# EAGLE board MOL-v1-0 (EAGLE 8.2.2)
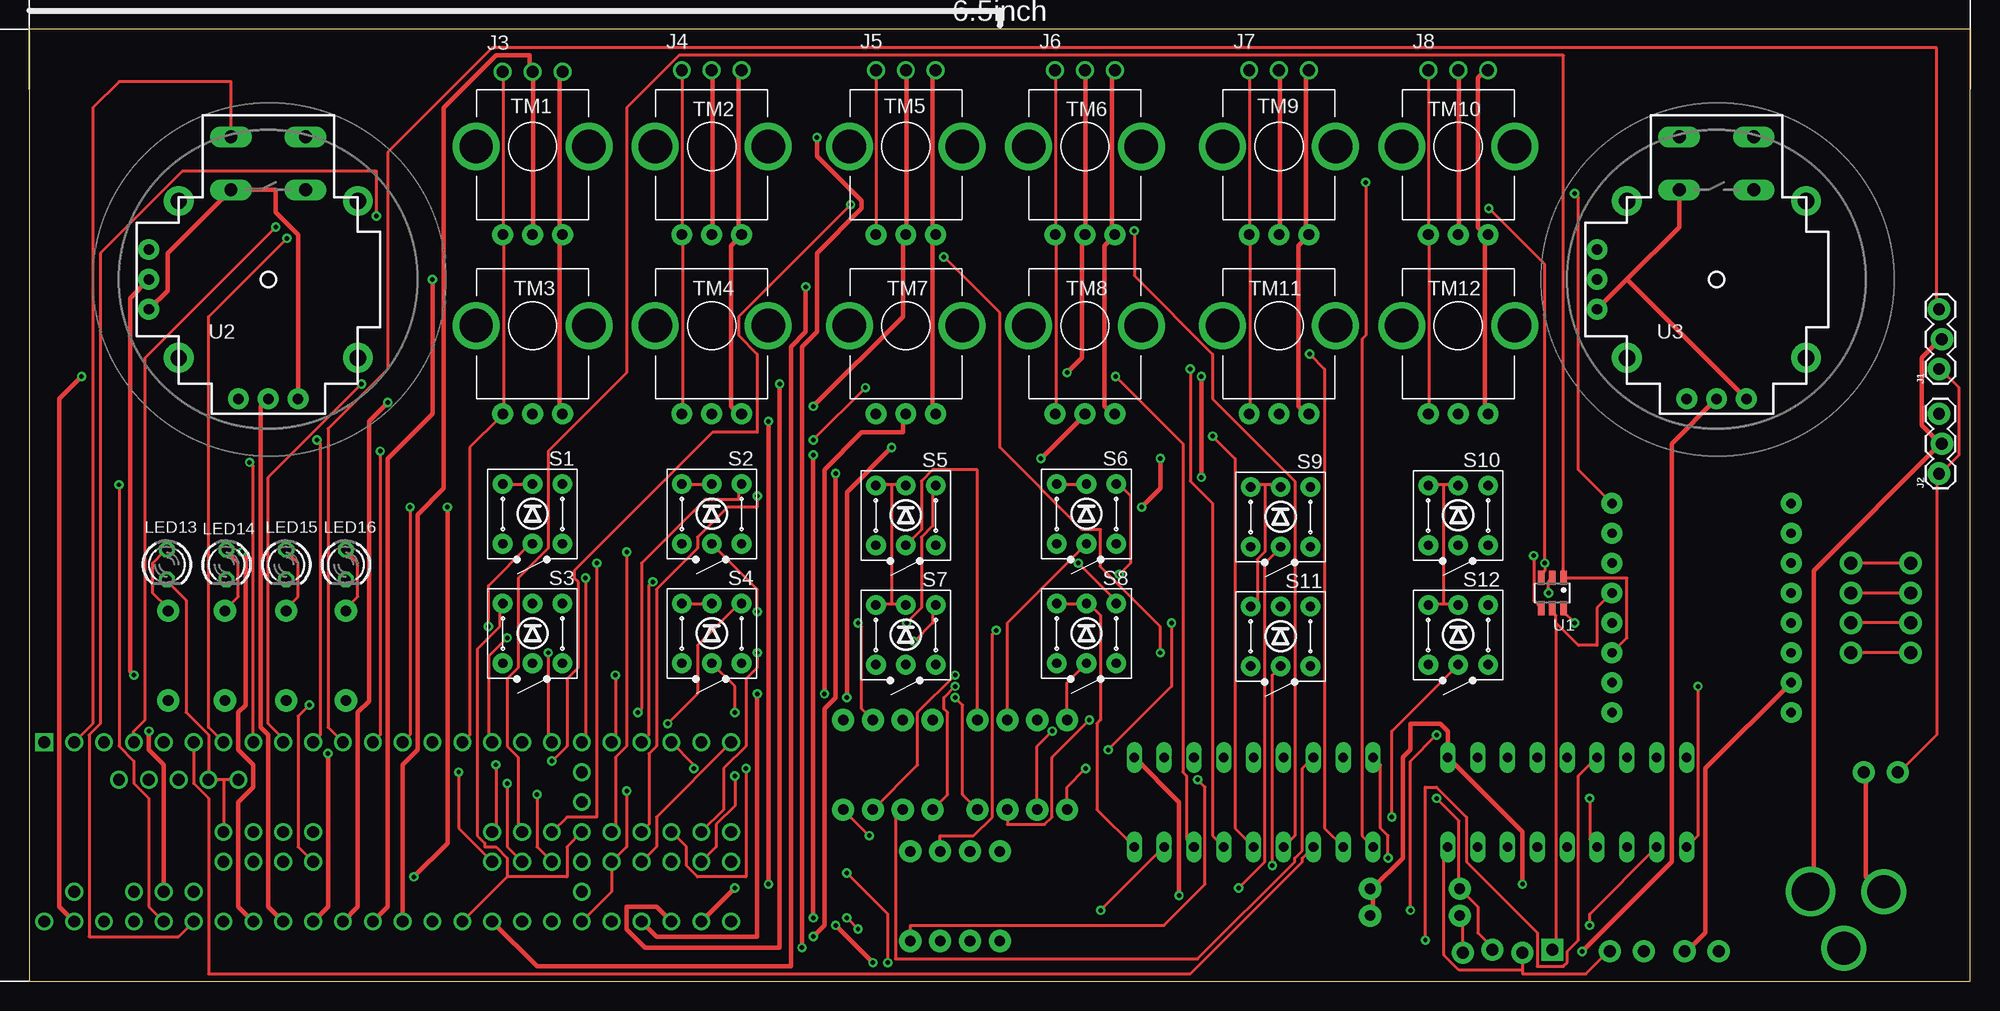
[diagram p0: board, top side]
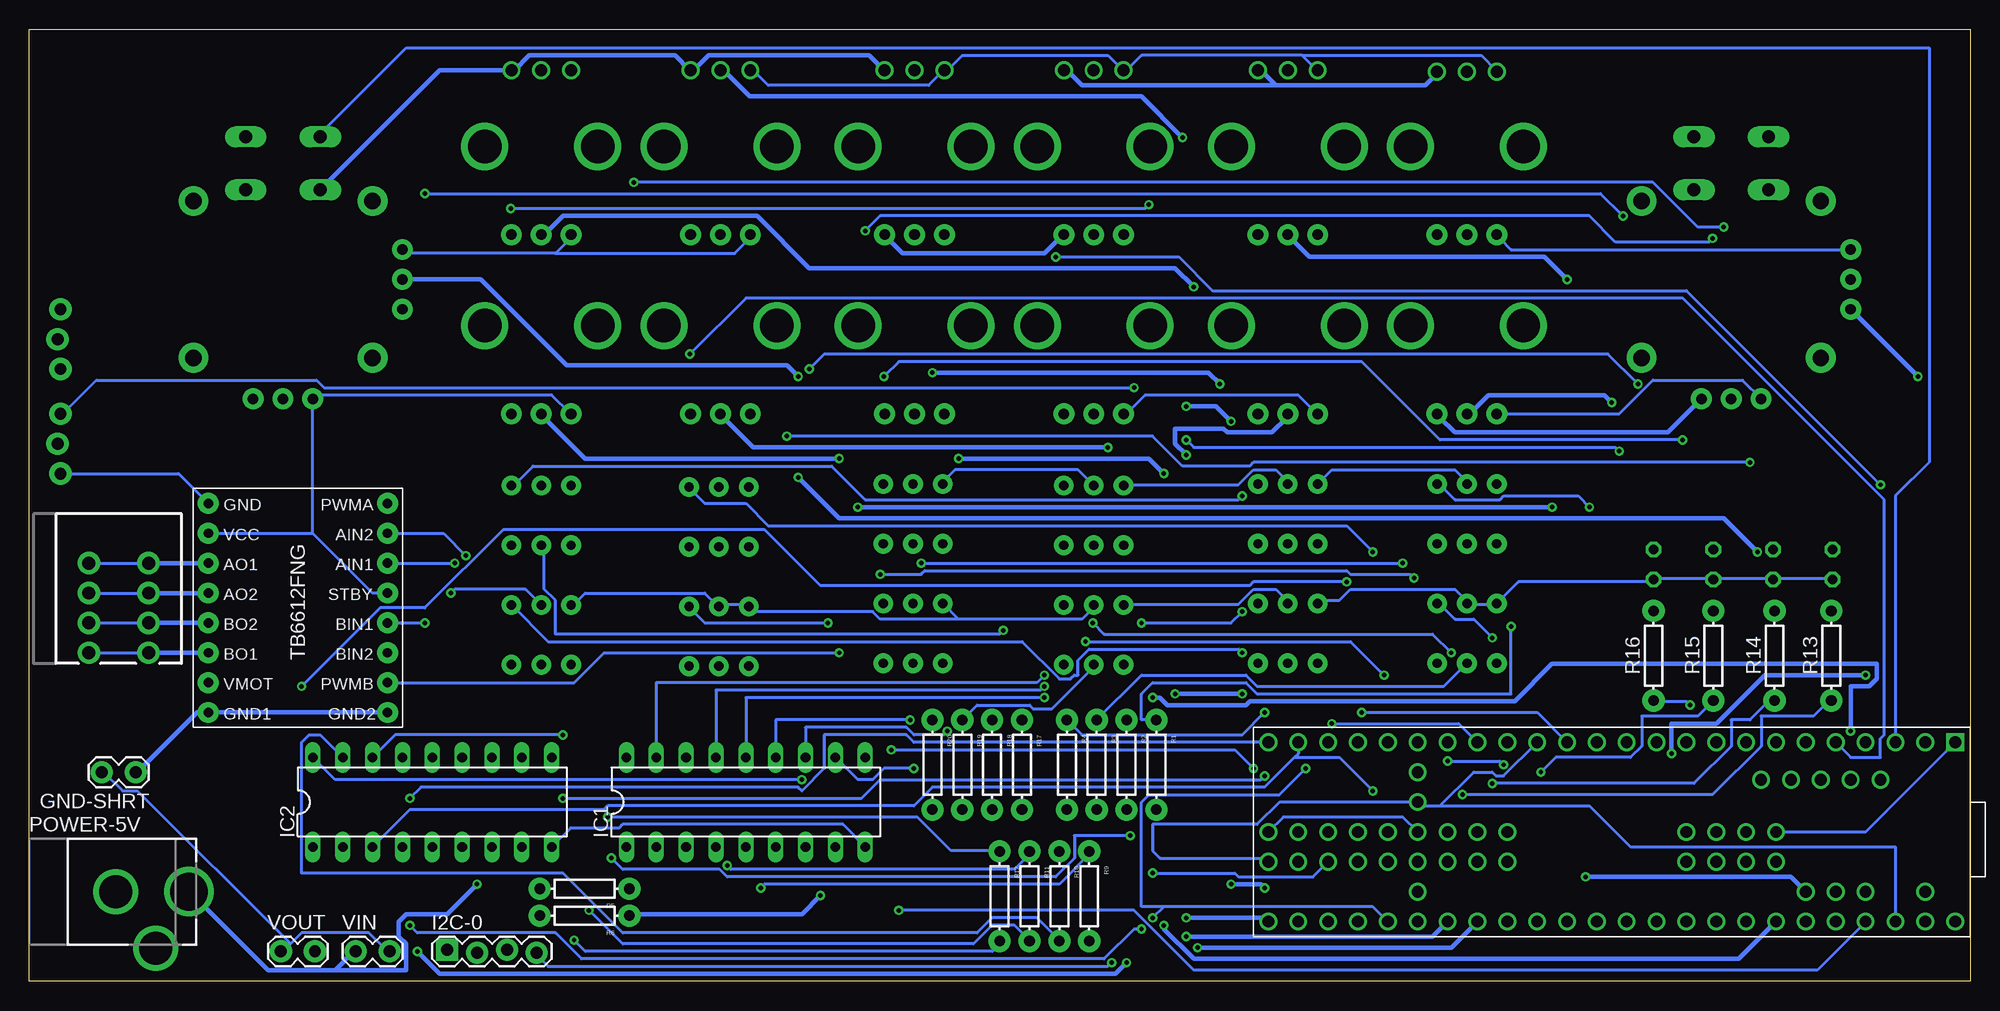
[diagram p1: board, bottom side, seen from below]

Size 165.08 x 80.95 mm. Coordinates in mm from the lower left corner, seen from the top.
Outline: 0,0 165.08,0 165.08,80.95 0,80.95 0,0
Copper layers (1*16): Top 0.035559375mm / dielectric 1.501140625mm / Bottom 0.035559375mm
Design rules "typical_4pcb": minimum track width 10mil, minimum drill 15mil, track to track 6mil, track to pad 6mil, pad to pad 6mil, via to via 6mil, smd to smd 6mil, copper to edge 15mil, drill to drill 8mil, minimum pad ring 10mil, minimum via ring 8mil, stop-mask expansion 4mil, vias tented up to drill 0mil, thermal gap 10mil
Net classes: 2 Power: width 0.381 mm, clearance 0.279 mm; 3 Analog Sig: width 0.381 mm, clearance 0.279 mm

## Footprints (pad centres in the part's own frame; a part is rotated, then mirrored left to right if it is on the bottom)
1X02_LOCK = drill 1.016 pad 1.88: 1 -0.178,0; 2 2.718,0
1X04_LOCK = drill 1.016 pad 1.88 square: 1 0,0.127 | drill 1.016 pad 1.88: 2 2.54,-0.127; 3 5.08,0.127; 4 7.62,-0.127
DIL18 = drill 0.813 long: 1 -10.16,-3.81; 2 -7.62,-3.81; 3 -5.08,-3.81; 4 -2.54,-3.81; 5 0,-3.81; 6 2.54,-3.81; 7 5.08,-3.81; 8 7.62,-3.81; 9 10.16,-3.81; 10 10.16,3.81; 11 7.62,3.81; 12 5.08,3.81; 13 2.54,3.81; 14 0,3.81; 15 -2.54,3.81; 16 -5.08,3.81; 17 -7.62,3.81; 18 -10.16,3.81
1X03_LOCK@1 = drill 1.016 pad 1.88: 1 0,0.127; 2 2.54,-0.127; 3 5.08,0.127
1X03_NO_SILK = drill 1.016 pad 1.524: 1 0,0; 2 2.54,0; 3 5.08,0
LED3MM = drill 0.813 octagon: A -1.27,0; K 1.27,0
SPRINGTERMINAL-2.54MM-4 = drill 1.1 pad 1.9: 1 7.62,-2.54; 2 5.08,-2.54; 3 2.54,-2.54; 4 0,-2.54; P$1 7.62,2.54; P$2 5.08,2.54; P$3 2.54,2.54; P$4 0,2.54
DCJACK_2MM_PTH = drill 2.8: GND 0,7.35; GNDBREAK 4.8,10.75 | drill 3.2: PWR 0,13.6
AXIAL-0.3EZ = drill 0.9 pad 1.88: P$1 -3.81,0; P$2 3.81,0
TR2-SWITCH-MOMENTARY-LED = drill 0.8 pad 1.676: 1 2.54,-2.54; 2 2.54,2.54; 3 -2.54,-2.54; 4 -2.54,2.54; A 0,2.54; C 0,-2.54
TRIM-PCB-9MM = drill 0.9 pad 1.778: 1 -2.54,-7.5; 2 0,-7.5; 3 2.54,-7.5 | drill 2.845 pad 4: 5 -4.8,0; M2 4.8,0
SOT23-6 = smd 0.55 x 1.2: 1 -0.95,-1.3; 2 0,-1.3; 3 0.95,-1.3; 4 0.95,1.3; 5 0,1.3; 6 -0.95,1.3
JOYSTICK = drill 1.1 pad 1.778 long: B1A -3.175,12.12; B1B 3.175,12.12; B2A -3.175,7.62; B2B 3.175,7.62 | drill 0.889 pad 1.778: H1 -2.54,-10.16; H2 0,-10.16; H3 2.54,-10.16; V1 -10.16,2.54; V2 -10.16,0; V3 -10.16,-2.54 | drill 1.397 pad 2.54: MOUNT1 -7.62,6.668; MOUNT2 -7.62,-6.668; MOUNT3 7.62,-6.668; MOUNT4 7.62,6.668
T36 = drill 1: 0 -15.24,-5.08; 1 -12.7,-5.08; 2 -10.16,-5.08; 3 -7.62,-5.08; 3V3(1) 17.78,-5.08; 3V3(2) 27.94,0; 3V3(3) -12.7,10.16; 3V3(4) 40.64,5.08; 4 -5.08,-5.08; 5 -2.54,-5.08; 5V -11.43,-1.905; 6 0,-5.08; 7 2.54,-5.08; 8 5.08,-5.08; 9 7.62,-5.08; 10 10.16,-5.08; 11 12.7,-5.08; 12 15.24,-5.08; 13 15.24,10.16; 14 12.7,10.16; 15 10.16,10.16; 16 7.62,10.16; 17 5.08,10.16; 18 2.54,10.16; 19 0,10.16; 20 -2.54,10.16; 21 -5.08,10.16; 22 -7.62,10.16; 23 -10.16,10.16; 24 20.32,-5.08; 25 22.86,-5.08; 26 25.4,-5.08; 27 27.94,-5.08; 28 30.48,-5.08; 29 33.02,-5.08; 30 35.56,-5.08; 31 38.1,-5.08; 32 40.64,-5.08; 33 40.64,10.16; 34 38.1,10.16; 35 35.56,10.16; 36 33.02,10.16; 37 30.48,10.16; 38 27.94,10.16; 39 25.4,10.16; 40 20.32,2.54; 41 22.86,2.54; 42 25.4,2.54; 43 30.48,2.54; 44 33.02,2.54; 45 35.56,2.54; 46 38.1,2.54; 47 38.1,5.08; 48 35.56,5.08; 49 33.02,5.08; 50 30.48,5.08; 51 25.4,5.08; 52 22.86,5.08; 53 20.32,5.08; 54 5.08,5.08; 55 2.54,5.08; 56 0,5.08; 57 -2.54,5.08; A10 -7.62,7.62; A11 -5.08,7.62; AGND -15.24,10.16; AREF -10.16,7.62; D+ -6.35,-1.905; D- -8.89,-1.905; DAC0 22.86,10.16; DAC1 20.32,10.16; DC 2.54,2.54; DD 5.08,2.54; DE 0,2.54; G1 27.94,2.54; G2 17.78,10.16; G3 40.64,2.54; G4 -3.81,-1.905; G5 -1.27,-1.905; G6 -2.54,2.54; P 27.94,5.08; R 27.94,7.62; VBAT 27.94,-2.54; VIN -17.78,10.16; VUSB -15.24,7.62 | drill 1 square: G0 -17.78,-5.08
POLOLU_TB6612FNG = drill 0.8 pad 1.778: AIN1 7.62,3.81; AIN2 7.62,6.35; AO1 -7.62,3.81; AO2 -7.62,1.27; BIN1 7.62,-1.27; BIN2 7.62,-3.81; BO1 -7.62,-3.81; BO2 -7.62,-1.27; GND -7.62,8.89; GND1 -7.62,-8.89; GND2 7.62,-8.89; PWMA 7.62,8.89; PWMB 7.62,-6.35; STBY 7.62,1.27; VCC -7.62,6.35; VMOT -7.62,-6.35

## Placement (x,y rotation side)
GND-SHRT  [1X02_LOCK]  156.21,17.78 180 bottom
I2C-0  [1X04_LOCK]  129.54,2.54 0 bottom
IC1  ULN2803  [DIL18]  104.14,15.24 0 bottom
IC2  ULN2803  [DIL18]  130.81,15.24 0 bottom
J1  SERVO 1  [1X03_LOCK@1]  162.56,52.07 90 top
J2  SERVO 2  [1X03_LOCK@1]  162.56,43.18 90 top
J3  [1X03_NO_SILK]  40.26,77.34 0 top
J4  [1X03_NO_SILK]  55.5,77.47 0 top
J5  [1X03_NO_SILK]  72.01,77.47 0 top
J6  [1X03_NO_SILK]  87.25,77.47 0 top
J7  [1X03_NO_SILK]  103.76,77.47 0 top
J8  [1X03_NO_SILK]  119,77.47 0 top
LED13  [LED3MM]  11.68,35.43 270 top
LED14  [LED3MM]  16.76,35.43 270 top
LED15  [LED3MM]  21.84,35.43 270 top
LED16  [LED3MM]  26.92,35.43 270 top
MOTORS1  [SPRINGTERMINAL-2.54MM-4]  157.48,35.56 270 bottom
POWER-5V  [DCJACK_2MM_PTH]  165.1,7.62 270 bottom
R1  [AXIAL-0.3EZ]  69.22,18.41 270 bottom
R2  [AXIAL-0.3EZ]  71.75,18.41 270 bottom
R3  [AXIAL-0.3EZ]  74.3,18.41 270 bottom
R4  [AXIAL-0.3EZ]  76.83,18.41 270 bottom
R5  [AXIAL-0.3EZ]  117.86,7.87 180 bottom
R6  [AXIAL-0.3EZ]  117.86,5.59 180 bottom
R9  [AXIAL-0.3EZ]  74.93,7.24 270 bottom
R10  [AXIAL-0.3EZ]  77.47,7.24 270 bottom
R11  [AXIAL-0.3EZ]  80.01,7.24 270 bottom
R12  [AXIAL-0.3EZ]  82.55,7.24 270 bottom
R13  [AXIAL-0.3EZ]  11.81,27.69 270 bottom
R14  [AXIAL-0.3EZ]  16.64,27.69 270 bottom
R15  [AXIAL-0.3EZ]  21.84,27.69 270 bottom
R16  [AXIAL-0.3EZ]  26.92,27.69 270 bottom
R17  [AXIAL-0.3EZ]  80.64,18.41 270 bottom
R18  [AXIAL-0.3EZ]  83.19,18.41 270 bottom
R19  [AXIAL-0.3EZ]  85.72,18.41 270 bottom
R20  [AXIAL-0.3EZ]  88.27,18.41 270 bottom
S1  SW-LEDPTH  [TR2-SWITCH-MOMENTARY-LED]  42.8,39.75 180 top
S2  SW-LEDPTH  [TR2-SWITCH-MOMENTARY-LED]  58.04,39.75 180 top
S3  SW-LEDPTH  [TR2-SWITCH-MOMENTARY-LED]  42.8,29.59 180 top
S4  SW-LEDPTH  [TR2-SWITCH-MOMENTARY-LED]  58.04,29.59 180 top
S5  SW-LEDPTH  [TR2-SWITCH-MOMENTARY-LED]  74.55,39.62 180 top
S6  SW-LEDPTH  [TR2-SWITCH-MOMENTARY-LED]  89.92,39.75 180 top
S7  SW-LEDPTH  [TR2-SWITCH-MOMENTARY-LED]  74.55,29.46 180 top
S8  SW-LEDPTH  [TR2-SWITCH-MOMENTARY-LED]  89.92,29.59 180 top
S9  SW-LEDPTH  [TR2-SWITCH-MOMENTARY-LED]  106.43,39.5 180 top
S10  SW-LEDPTH  [TR2-SWITCH-MOMENTARY-LED]  121.54,39.62 180 top
S11  SW-LEDPTH  [TR2-SWITCH-MOMENTARY-LED]  106.43,29.34 180 top
S12  SW-LEDPTH  [TR2-SWITCH-MOMENTARY-LED]  121.54,29.46 180 top
TM1  [TRIM-PCB-9MM]  42.8,70.99 0 top
TM2  [TRIM-PCB-9MM]  58.04,70.99 0 top
TM3  [TRIM-PCB-9MM]  42.8,55.75 0 top
TM4  [TRIM-PCB-9MM]  58.04,55.75 0 top
TM5  [TRIM-PCB-9MM]  74.55,70.99 0 top
TM6  [TRIM-PCB-9MM]  89.79,70.99 0 top
TM7  [TRIM-PCB-9MM]  74.55,55.75 0 top
TM8  [TRIM-PCB-9MM]  89.79,55.75 0 top
TM9  [TRIM-PCB-9MM]  106.3,70.99 0 top
TM10  [TRIM-PCB-9MM]  121.54,70.99 0 top
TM11  [TRIM-PCB-9MM]  106.3,55.75 0 top
TM12  [TRIM-PCB-9MM]  121.54,55.75 0 top
U1  SN74LVC2G04DBV  [SOT23-6]  129.54,33.02 180 top
U2  JOYSTICKPTH  [JOYSTICK]  20.32,59.69 0 top
U3  JOYSTICKPTH  [JOYSTICK]  143.51,59.69 0 top
U$1  TEENSY3_6--ALLPINS  [T36]  19.05,15.24 180 bottom
U$7  POLOLU_TB6612FNG  [POLOLU_TB6612FNG]  142.24,31.75 0 bottom
VIN  [1X02_LOCK]  137.16,2.54 0 bottom
VOUT  [1X02_LOCK]  143.51,2.54 0 bottom

## Library data of the parts
GND-SHRT I2C-0 MOTORS1 U$7 VIN VOUT = CMU-ArtFab
IC1 IC2 = uln-udn
J1-J8 = SparkFun-Connectors
LED13-LED16 = led
POWER-5V U2 U3 = adafruit
R1-R6 R9-R20 = SparkFun-Resistors
S1-S12 TM1-TM12 = Daniel
U1 = 74LV
U$1 = Teensy_3_6

## Nets
+3V3: I2C-0.1 J3.1 J4.1 J5.1 J6.1 J7.1 J8.1 TM1.1 TM2.1 TM3.1 TM4.1 TM5.1 TM6.1 TM7.1 TM8.1 TM9.1 TM10.1 TM11.1 TM12.1 U1.5 U2.H1 U2.V1 U3.H1 U3.V1 U$1.3V3(1) U$1.3V3(2) U$1.3V3(3) U$1.3V3(4) U$7.STBY U$7.VCC
+5V [Power]: IC1.10 IC2.10 J1.2 J2.2 POWER-5V.PWR R5.P$1 R6.P$1 VIN.1
A1 [Analog Sig]: J3.2 TM1.2 U$1.14
A2 [Analog Sig]: J4.2 TM2.2 U$1.15
A3 [Analog Sig]: TM3.2 U$1.16
A4 [Analog Sig]: TM4.2 U$1.33
A5 [Analog Sig]: J5.2 TM5.2 U$1.34
A6 [Analog Sig]: J6.2 TM6.2 U$1.35
A7 [Analog Sig]: TM7.2 U$1.36
A8 [Analog Sig]: TM8.2 U$1.39
A9 [Analog Sig]: J7.2 TM9.2 U$1.DAC0
A10 [Analog Sig]: J8.2 TM10.2 U$1.DAC1
A11 [Analog Sig]: TM11.2 U$1.A10
A12 [Analog Sig]: TM12.2 U$1.A11
AGND [Analog Sig]: J3.3 J4.3 J5.3 J6.3 J7.3 J8.3 TM1.3 TM2.3 TM3.3 TM4.3 TM5.3 TM6.3 TM7.3 TM8.3 TM9.3 TM10.3 TM11.3 TM12.3 U2.B2A U2.H3 U2.V3 U3.B2A U3.H3 U3.V3 U$1.AGND
B1: S1.3 U$1.11
B2: S2.3 U$1.12
B3: S3.3 U$1.24
B4: S4.3 U$1.25
B5: S5.3 U$1.26
B6: S6.3 U$1.27
B7: S7.3 U$1.28
B8: S8.3 U$1.42
B9: S9.3 U$1.43
B10: S10.3 U$1.44
B11: S11.3 U$1.45
B12: S12.3 U$1.46
GND: GND-SHRT.2 I2C-0.2 IC1.9 IC2.9 J1.1 J2.1 LED13.K LED14.K LED15.K LED16.K S1.1 S1.C S2.1 S2.C S3.1 S3.C S4.1 S4.C S5.1 S5.C S6.1 S6.C S7.1 S7.C S8.1 S8.C S9.1 S9.C S10.1 S10.C S11.1 S11.C S12.1 S12.C U1.2 U$1.G0 U$1.G1 U$1.G2 U$1.G3 U$1.G4 U$1.G5 U$1.G6 U$7.GND VIN.2 VOUT.1
GND_MOT [Power]: GND-SHRT.1 POWER-5V.GND U$7.GND1 U$7.GND2
GNDBREAK: POWER-5V.GNDBREAK
I2C_SCL: I2C-0.3 R5.P$2 U$1.47
I2C_SDA: I2C-0.4 R6.P$2 U$1.48
L1: IC1.1 U$1.2
L2: IC1.2 U$1.3
L3: IC1.3 U$1.4
L4: IC1.4 U$1.5
L5: IC1.5 U$1.6
L6: IC1.6 U$1.7
L7: IC1.7 U$1.8
L8: IC1.8 U$1.23
L9: IC2.1 U$1.29
L10: IC2.2 U$1.30 U$1.37
L11: IC2.3 U$1.31 U$1.38 U$1.50
L12: IC2.4 U$1.32 U$1.49
L13: IC2.5
L14: IC2.6
L15: IC2.7
L16: IC2.8
LED1: IC1.18 R1.P$2
LED2: IC1.17 R2.P$2
LED3: IC1.16 R3.P$2
LED4: IC1.15 R4.P$2
LED5: IC1.14 R17.P$2
LED6: IC1.13 R18.P$2
LED7: IC1.12 R19.P$2
LED8: IC1.11 R20.P$2
LED9: IC2.18 R9.P$2
LED10: IC2.17 R10.P$2
LED11: IC2.16 R11.P$2
LED12: IC2.15 R12.P$2
LED13: IC2.14
LED14: IC2.13
LED15: IC2.12
LED16: IC2.11
M_AIN: U1.3 U$1.40 U$7.AIN1
M_BIN: U1.1 U$1.41 U$7.BIN2
M_JOYB: U2.B1A U$1.0
M_JOYH [Analog Sig]: U2.H2 U$1.18
M_JOYV [Analog Sig]: U2.V2 U$1.17
M_PWMA: U$1.21 U$7.PWMA
M_PWMB: U$1.22 U$7.PWMB
N$1: R1.P$1 S1.A
N$2: LED13.A R13.P$1
N$3: LED14.A R14.P$1
N$4: LED15.A R15.P$1
N$5: U1.6 U$7.BIN1
N$6: U1.4 U$7.AIN2
N$7: LED16.A R16.P$1
N$8: R2.P$1 S2.A
N$9: R3.P$1 S3.A
N$10: R4.P$1 S4.A
N$15: R9.P$1 S9.A
N$16: R10.P$1 S10.A
N$17: R11.P$1 S11.A
N$18: R12.P$1 S12.A
N$19: R17.P$1 S5.A
N$20: R18.P$1 S6.A
N$21: R19.P$1 S7.A
N$22: R20.P$1 S8.A
N$45 [Power]: MOTORS1.P$1 U$7.BO1
N$46 [Power]: MOTORS1.P$2 U$7.BO2
N$52 [Power]: MOTORS1.P$3 U$7.AO2
N$54 [Power]: MOTORS1.P$4 U$7.AO1
S1: J1.3 U$1.9
S2: J2.3 U$1.10
S_JOYB: U3.B1A U$1.1
S_JOYH [Analog Sig]: U3.H2 U$1.20
S_JOYV [Analog Sig]: U3.V2 U$1.19
U1: R13.P$2 U$1.51
U2: R14.P$2 U$1.52
U3: R15.P$2 U$1.53
U4: R16.P$2 U$1.54
VMOT [Power]: U$7.VMOT VOUT.2

## Tracks (layer width: path | path; a pad name or v marks a point on that pad's centre or on a via)
+3V3
  Top 0.254: 129.86,30.48 129.86,31.11 129.54,31.43 U1.5 | 129.86,30.48 131.76,28.57 133.35,28.57 133.35,31.75 U$7.STBY | 129.86,30.48 129.86,3.17 129.54,2.86 I2C-0.1 | J3.1 40.32,77.15 40.32,63.5 TM1.1 40.32,63.18 40.32,48.26 TM3.1 40.01,47.94 37.47,45.4 37.47,20.95 U$1.3V3(1) | J7.1 103.82,77.47 103.82,63.5 TM9.1 103.82,63.18 103.82,48.26 TM11.1 | J8.1 119.06,77.47 119.06,63.5 TM10.1 119.06,63.18 119.06,48.26 TM12.1 | J5.1 72.07,77.47 72.07,63.5 TM5.1 | J6.1 87.31,77.47 87.31,63.5 TM6.1 87.31,63.18 87.31,48.26 TM8.1 | J4.1 55.56,77.47 55.56,63.5 TM2.1 55.56,63.18 55.56,48.26 TM4.1
  Bottom 0.254: U$1.3V3(3) 6.35,11.43 28.89,11.43 32.38,14.92 45.09,14.92 | 45.09,14.92 46.67,14.92 U$1.3V3(2) 58.74,15.24 60.64,13.34 69.53,13.34 69.53,11.11 68.9,10.48 60.01,10.48 U$1.3V3(4) | U$1.3V3(1) 39.69,17.46 40.32,17.46 40.64,17.78 42.23,17.78 45.09,14.92 | 140.97,38.1 U3.H1 140.65,49.85 120.65,49.85 119.06,48.26 TM12.1 | U$7.VCC 140.97,38.1 | 140.97,38.1 135.89,33.02 U$7.STBY | U2.H1 19.37,51.12 26.99,51.12 29.84,48.26 40.01,48.26 TM3.1 | U2.V1 39.05,62.23 40.01,63.18 TM1.1 | U3.V1 133.03,61.91 120.33,61.91 | 120.33,61.91 119.06,63.18 TM10.1 | 120.33,61.91 105.09,61.91 103.82,63.18 TM9.1 | TM7.1 71.75,48.26 70.17,49.85 57.15,49.85 55.56,48.26 TM4.1 | 56.83,78.74 70.48,78.74 71.75,77.47 J5.1 72.07,77.47 73.34,78.74 85.72,78.74 87,77.47 J6.1 87.31,77.47 88.58,76.2 102.23,76.2 103.5,77.47 J7.1 | 56.83,78.74 55.56,77.47 J4.1 | 56.83,78.74 41.59,78.74 40.32,77.47 J3.1
+5V  (via drill 0.38)
  Top 0.381: IC1.10 97.79,15.24 v97.79,7.3 | R6.P$1 114.3,5.71 114.3,7.62 R5.P$1 114.3,7.94 116.84,10.48 116.84,19.05 117.47,19.68 117.47,21.91 120.02,21.91 120.65,21.27 IC2.10 127,12.7 v127,8.26 | 162.56,45.72 160.97,47.31 160.97,53.02 162.56,54.61 J1.2 | 162.56,45.72 151.76,34.92 151.76,7.62 POWER-5V.PWR | 162.56,45.72 J2.2
  Bottom 0.381: v97.79,7.3 99.38,5.71 113.98,5.71 R6.P$1 | 139.06,0.95 137.48,2.54 VIN.1 | 139.06,0.95 144.78,0.95 151.45,7.62 POWER-5V.PWR | v127,8.26 129.54,5.71 133.03,5.71 133.67,5.08 133.67,3.81 133.03,3.17 133.03,0.95 139.06,0.95
A1
  Top 0.381: U$1.14 31.75,18.41 33.02,19.68 33.02,39.69 35.24,41.91 35.24,74.3 39.69,78.74 42.55,78.74 42.55,77.47 J3.2 42.86,77.15 42.86,63.5 TM1.2
A2  (via drill 0.38)
  Top 0.381: U$1.15 30.48,6.35 30.48,44.45 34.29,48.26 v34.29,59.69 | J4.2 58.1,77.47 58.1,63.5 TM2.2
  Bottom 0.381: v34.29,59.69 36.2,61.59 56.2,61.59 57.78,63.18 TM2.2
A3  (via drill 0.38)
  Top 0.381: U$1.16 27.94,6.35 27.94,22.86 28.89,23.81 28.89,47.62 v30.48,49.21
  Bottom 0.381: v30.48,49.21 31.11,49.85 40.96,49.85 42.55,48.26 TM3.2
A4  (via drill 0.38)
  Top 0.381: v66.67,44.77 v66.67,5.4
  Bottom 0.381: U$1.33 60.01,5.4 v66.67,5.4 | v66.67,44.77 67.63,45.72 67.63,46.99 63.5,46.99 63.18,46.67 59.37,46.67 58.1,47.94 TM4.2
A5  (via drill 0.38)
  Top 0.381: v60.01,7.94 U$1.34 | v62.87,47.62 v62.87,8.26 | v66.67,48.9 74.3,56.52 74.3,63.18 TM5.2 74.61,63.5 74.61,77.47 J5.2
  Bottom 0.381: v60.01,7.94 60.33,8.26 v62.87,8.26 | v62.87,47.62 64.14,48.9 v66.67,48.9
A6  (via drill 0.38)
  Top 0.381: U$1.35 53.34,6.35 50.8,6.35 50.8,4.45 52.39,2.86 63.82,2.86 v63.82,50.8 | v88.27,51.75 89.53,53.02 89.53,63.18 TM6.2 89.85,63.5 89.85,77.47 J6.2
  Bottom 0.381: v63.82,50.8 64.77,51.75 v88.27,51.75
A7  (via drill 0.38)
  Top 0.381: U$1.36 53.34,3.81 61.91,3.81 v61.91,24.45 | v67.63,24.45 67.63,43.5 70.8,46.67 74.3,46.67 74.3,47.94 TM7.2
  Bottom 0.381: v67.63,24.45 v61.91,24.45
A8  (via drill 0.38)
  Top 0.381: v66.67,3.81 67.63,4.76 67.63,23.18 68.58,24.13 v68.58,43.18 | v86.04,44.45 89.53,47.94 TM8.2
  Bottom 0.381: U$1.39 45.72,3.81 v66.67,3.81 | v68.58,43.18 69.85,44.45 v86.04,44.45
A9  (via drill 0.38)
  Top 0.381: v65.72,2.86 65.72,53.98 66.99,55.24 66.99,61.91 70.8,65.72 70.8,66.36 66.99,70.17 v66.99,71.75 | TM9.2 106.36,63.5 106.36,77.47 J7.2
  Bottom 0.381: U$1.DAC0 44.13,2.86 v65.72,2.86 | v66.99,71.75 70.48,75.25 103.82,75.25 106.05,77.47 J7.2
A10  (via drill 0.38)
  Top 0.381: U$1.DAC1 43.18,1.27 64.77,1.27 64.77,53.98 66.04,55.24 v66.04,59.05 | J8.2 121.6,77.47 121.6,63.5 TM10.2
  Bottom 0.381: v66.04,59.05 67.63,60.64 98.74,60.64 103.19,65.09 119.7,65.09 121.28,63.5 TM10.2
A11  (via drill 0.38)
  Top 0.381: U$1.A10 11.43,18.41 10.16,19.68 v10.16,21.27 | v69.53,24.13 69.53,41.59 v73.34,45.4
  Bottom 0.381: v10.16,21.27 10.16,25.08 8.57,25.08 7.94,25.72 7.94,26.99 35.56,26.99 38.73,23.81 61.28,23.81 61.59,23.5 68.26,23.5 68.9,24.13 v69.53,24.13 | v73.34,45.4 103.5,45.4 106.05,47.94 TM11.2
A12  (via drill 0.38)
  Top 0.381: v32.7,8.89 35.56,11.75 v35.56,40.32 | v94.61,40.32 96.2,41.91 v96.2,44.45
  Bottom 0.381: U$1.A11 15.24,8.89 v32.7,8.89 | v94.61,40.32 v35.56,40.32 | v96.2,44.45 117.79,44.45 121.28,47.94 TM12.2
AGND  (via drill 0.38)
  Top 0.381: U$1.AGND 2.54,6.35 2.54,49.53 v4.45,51.44 | U2.V3 11.75,58.74 11.75,61.91 U2.B2A 20.95,67.31 20.95,65.41 22.86,63.5 U2.H3 | 135.89,59.69 140.34,64.14 U3.B2A | 135.89,59.69 U3.V3 | 135.89,59.69 U3.H3 | J7.3 108.58,77.47 108.58,63.5 TM9.3 108.58,63.18 107.95,62.55 107.95,48.9 108.58,48.26 TM11.3 | J8.3 123.83,77.47 123.19,76.83 123.19,64.14 123.83,63.5 TM10.3 123.83,63.18 123.83,48.26 TM12.3 | J6.3 92.08,77.47 92.08,63.5 TM6.3 92.08,63.18 91.44,62.55 91.44,48.9 92.08,48.26 TM8.3 | J5.3 76.83,77.47 76.83,63.5 TM5.3 76.83,63.18 76.83,48.26 TM7.3 | J4.3 60.33,77.47 60.33,63.5 TM2.3 60.33,63.18 59.69,62.55 59.69,48.9 60.33,48.26 TM4.3 | J3.3 45.09,77.15 45.09,63.5 TM1.3 45.09,63.18 45.09,48.26 TM3.3
  Bottom 0.381: U2.V3 v4.45,51.44 | U3.B2A 130.18,77.47 J8.3 123.83,77.47 122.56,78.74 110.17,78.74 108.9,77.47 J7.3 108.58,77.47 107.31,78.74 93.66,78.74 92.39,77.47 J6.3 | U2.H3 25.72,46.67 43.81,46.67 45.09,47.94 TM3.3 | 59.05,76.2 60.33,77.47 J4.3 | 59.05,76.2 46.35,76.2 45.4,77.15 J3.3 | 59.05,76.2 75.56,76.2 76.83,77.47 J5.3 | TM6.3 92.08,63.18 90.81,61.91 78.74,61.91 77.47,63.18 77.15,63.18 TM5.3
B1  (via drill 0.38)
  Top 0.254: U$1.11 32.38,20.95 v32.38,40.32
  Bottom 0.254: v32.38,40.32 33.34,41.27 39.69,41.27 40.01,40.96 43.81,40.96 45.09,42.23 S1.3
B2  (via drill 0.38)
  Top 0.254: v51.75,22.86 52.07,23.18 52.07,35.56 57.47,40.96 60.33,40.96 60.33,42.23 S2.3
  Bottom 0.254: U$1.12 36.83,22.86 v51.75,22.86
B3  (via drill 0.38)
  Top 0.254: U$1.24 39.05,20.64 39.05,27.62 v40.64,29.21
  Bottom 0.254: v40.64,29.21 42.23,30.8 43.81,30.8 45.09,32.07 S3.3
B4  (via drill 0.38)
  Top 0.254: v54.29,21.91 56.83,24.45 56.83,28.57 60.33,32.07 S4.3
  Bottom 0.254: U$1.25 43.5,21.91 v54.29,21.91
B5  (via drill 0.38)
  Top 0.254: U$1.26 44.13,20.64 v44.13,27.94 | v74.61,30.48 75.88,31.75 75.88,37.78 76.83,38.73 76.83,41.91 S5.3
  Bottom 0.254: v44.13,27.94 45.72,29.53 73.66,29.53 v74.61,30.48
B6  (via drill 0.38)
  Top 0.254: U$1.27 47.31,20.64 v47.31,34.29 | v92.71,34.61 93.66,35.56 93.66,41.27 92.71,42.23 S6.3
  Bottom 0.254: v47.31,34.29 47.62,34.61 52.7,34.61 53.02,34.92 88.9,34.92 89.22,34.61 v92.71,34.61
B7  (via drill 0.38)
  Top 0.254: U$1.28 49.85,20.64 v49.85,26.04 | v75.25,28.89 76.83,30.48 76.83,31.75 S7.3
  Bottom 0.254: v49.85,26.04 52.7,28.89 v75.25,28.89
B8  (via drill 0.38)
  Top 0.254: U$1.42 45.72,13.97 48.26,13.97 v48.26,35.56 | v89.22,35.56 92.39,32.38 S8.3
  Bottom 0.254: v89.22,35.56 v48.26,35.56
B9  (via drill 0.38)
  Top 0.254: U$1.43 49.85,13.02 49.85,19.05 50.8,20 v50.8,36.51
  Bottom 0.254: v50.8,36.51 53.02,38.73 102.23,38.73 104.14,40.64 107.63,40.64 108.9,41.91 S9.3
B10  (via drill 0.38)
  Top 0.254: U$1.44 52.7,13.34 52.7,19.37 53.34,20 53.34,33.34 56.83,36.83 56.83,37.78 59.37,40.32 61.91,40.32 v61.91,41.27
  Bottom 0.254: v61.91,41.27 62.23,40.96 93.98,40.96 96.84,43.81 122.24,43.81 123.83,42.23 S10.3
B11  (via drill 0.38)
  Top 0.254: U$1.45 55.88,11.43 55.88,9.84 56.83,8.89 60.96,8.89 v60.96,18.1 | v91.76,19.68 97.16,25.08 v97.16,30.48
  Bottom 0.254: v60.96,18.1 62.55,19.68 v91.76,19.68 | v97.16,30.48 107.63,30.48 108.9,31.75 S11.3
B12  (via drill 0.38)
  Top 0.254: U$1.46 59.05,14.61 59.05,18.1 60.96,20 60.96,25.72 61.91,26.67 v61.91,27.94
  Bottom 0.254: v61.91,27.94 62.23,28.26 74.93,28.26 75.88,27.3 75.88,26.04 76.2,26.04 76.52,25.72 77.47,25.72 80.64,28.89 120.97,28.89 S12.3
GND  (via drill 0.38)
  Top 0.254: IC2.9 120.33,11.11 120.33,2.22 121.6,0.95 127,0.95 | I2C-0.2 127,0.95 | 127,0.95 127,0.64 132.4,0.64 134.3,2.54 VIN.2 | GND-SHRT.2 159.07,17.78 162.24,20.95 162.24,43.18 J2.1 162.56,43.18 164.15,44.77 164.15,50.48 162.56,52.07 J1.1 | 40.64,8.89 U$1.G2 | 40.64,8.89 45.72,8.89 45.72,11.43 U$1.G1 | U$1.G5 16.51,17.14 | 16.51,17.14 U$1.G4 15.24,20.95 13.34,22.86 13.34,32.38 11.75,33.97 LED13.K | 16.51,17.14 U$1.G6 | 40.64,8.89 40.64,10.48 39.69,11.43 38.73,11.43 38.73,11.75 38.1,12.38 38.1,28.26 40.01,30.16 40.01,32.07 S3.1 | 105.09,42.23 106.36,42.23 S9.C | 105.09,42.23 104.14,42.23 S9.1 | 105.09,42.23 105.09,36.51 104.46,35.88 104.46,32.38 104.14,32.07 S11.1 | 120.33,42.23 121.28,42.23 S10.C | 120.33,42.23 119.06,42.23 S10.1 | v129.22,33.02 129.22,33.97 129.54,34.29 U1.2 | 120.33,32.07 121.28,32.07 S12.C | 120.33,32.07 119.06,32.07 S12.1 | 120.33,32.07 120.33,42.23 | IC1.9 90.81,14.61 90.81,21.91 91.12,22.23 91.12,31.11 90.17,32.07 S8.C 89.85,32.07 87.63,32.07 S8.1 | S1.1 40.32,42.23 42.55,42.23 S1.C | S2.1 55.56,42.23 57.78,42.23 S2.C | S6.1 87.63,42.23 89.85,42.23 S6.C | S4.1 55.56,32.07 57.78,32.07 S4.C | 73.34,32.07 74.3,32.07 S7.C | 73.34,32.07 72.07,32.07 S7.1 | 73.34,42.23 74.3,42.23 S5.C | 73.34,42.23 72.07,42.23 S5.1 | 73.34,42.23 73.34,32.07
  Bottom 0.254: 142.88,3.17 141.92,4.13 136.21,4.13 134.62,2.54 VIN.2 | 142.88,3.17 143.51,2.54 VOUT.1 | U$7.GND 152.4,43.18 J2.1 | 142.88,3.17 155.89,16.19 157.16,16.19 158.75,17.78 GND-SHRT.2 | U$1.G3 58.42,13.97 48.26,13.97 U$1.G1 | U$1.G0 8.89,12.7 U$1.G6 | LED13.K 11.75,34.29 16.51,34.29 LED14.K 16.83,34.29 21.59,34.29 LED15.K 21.91,34.29 26.67,34.29 LED16.K 26.99,33.97 38.42,33.97 S3.1 40.32,32.07 42.55,32.07 S3.C 42.86,32.38 43.81,33.34 52.7,33.34 53.66,32.38 55.24,32.38 S4.1 | v129.22,33.02 128.91,33.34 122.87,33.34 S12.C | S12.1 118.75,32.07 117.79,33.02 107.63,33.02 106.68,32.07 S11.C 106.36,32.07 104.14,32.07 S11.1 103.82,31.75 103.5,31.43 93.34,31.43 92.71,30.8 86.04,30.8 | S2.1 54.29,43.5 43.81,43.5 42.86,42.55 S1.C | S4.C 58.1,32.38 59.05,33.34 60.96,33.34 62.23,32.07 71.75,32.07 S7.1 | S5.C 75.88,43.5 86.36,43.5 87.31,42.55 S6.1 | S2.C 58.1,42.55 59.05,43.5 60.96,43.5 62.23,42.23 71.75,42.23 S5.1 | 86.04,30.8 S8.1 | 86.04,30.8 75.56,30.8 74.61,31.75 S7.C | IC2.9 119.06,13.02 114.94,13.02 114.62,13.34 95.89,13.34 IC1.9
GND_MOT
  Top 0.381: POWER-5V.GND 157.48,7.62 156.21,8.89 156.21,17.78 GND-SHRT.1
  Bottom 0.381: U$7.GND2 U$7.GND1 150.81,22.86 155.89,17.78 GND-SHRT.1
I2C_SCL  (via drill 0.38)
  Top 0.254: U$1.47 58.42,11.43 58.42,13.34 60.01,14.92 v60.01,17.46 | v119.7,15.56 121.6,13.65 121.6,7.94 R5.P$2 123.19,6.35 123.19,4.13 124.46,2.86 I2C-0.3
  Bottom 0.254: v60.01,17.46 60.33,17.14 92.71,17.14 94.3,15.56 v119.7,15.56
I2C_SDA  (via drill 0.38)
  Top 0.254: v69.53,9.21 73.03,5.71 v73.03,1.59 | I2C-0.4 121.92,5.4 R6.P$2
  Bottom 0.254: U$1.48 55.88,8.89 62.23,8.89 62.55,9.21 v69.53,9.21 | v73.03,1.59 73.34,1.27 120.97,1.27 121.92,2.22 I2C-0.4
L1  (via drill 0.38)
  Top 0.254: IC1.1 113.35,12.38 113.35,54.61 113.67,54.93 v113.67,67.94 | v20.95,64.14 9.84,53.02 9.84,22.23 8.89,21.27 U$1.2
  Bottom 0.254: v113.67,67.94 26.99,67.94 23.18,64.14 v20.95,64.14
L2  (via drill 0.38)
  Top 0.254: IC1.2 110.17,13.02 110.17,52.07 v108.9,53.34
  Bottom 0.254: v108.9,53.34 104.14,58.1 24.45,58.1 7.3,40.96 7.3,20.95 7.62,20.64 7.62,19.05 10.16,19.05 U$1.3
L3
  Top 0.254: IC1.3 108.27,10.48 108.27,10.16 98.74,0.64 15.24,0.64 15.24,15.56 13.97,16.83 U$1.4
L4  (via drill 0.38)
  Top 0.254: IC1.4 107.63,12.38 107.63,42.55 100.65,49.53 100.65,53.34 93.98,60.01 v93.98,63.82 | v21.91,63.18 15.24,56.52 15.24,21.59 U$1.5
  Bottom 0.254: v93.98,63.82 92.71,65.09 32.38,65.09 30.16,62.87 22.23,62.87 v21.91,63.18
L5  (via drill 0.38)
  Top 0.254: IC1.5 102.55,13.02 102.55,44.45 v100.65,46.35 | v18.73,44.13 19.05,43.81 U$1.6
  Bottom 0.254: v100.65,46.35 69.53,46.35 66.99,43.81 61.28,43.81 60.96,44.13 v18.73,44.13
L6  (via drill 0.38)
  Top 0.254: IC1.6 100.65,12.38 100.65,40.64 98.74,42.55 v98.74,52.07 | v28.26,50.8 20.32,42.86 20.32,21.91 21.59,20.64 U$1.7
  Bottom 0.254: v98.74,52.07 97.47,53.34 30.8,53.34 v28.26,50.8
L7  (via drill 0.38)
  Top 0.254: IC1.7 98.42,12.06 98.42,17.46 98.11,17.78 98.11,45.72 v92.39,51.44 | v24.45,46.04 24.77,45.72 24.77,20.95 U$1.8
  Bottom 0.254: v92.39,51.44 91.12,52.7 51.75,52.7 45.09,46.04 v24.45,46.04
L8  (via drill 0.38)
  Top 0.254: v91.12,6.03 IC1.8
  Bottom 0.254: v91.12,6.03 71.12,6.03 66.04,0.95 13.02,0.95 U$1.23
L9  (via drill 0.38)
  Top 0.254: IC2.1 141.92,12.38 v141.92,25.08 | v53.02,33.97 52.7,33.66 52.7,20.95 U$1.29
  Bottom 0.254: v141.92,25.08 135.25,31.75 131.44,31.75 124.78,38.42 102.55,38.42 97.79,33.66 61.28,33.66 60.96,33.97 v53.02,33.97
L10  (via drill 0.38)
  Top 0.254: IC2.2 132.72,5.71 v132.72,4.76 | v69.53,5.4 v70.48,4.45 | U$1.30 56.52,18.41 v56.52,18.1
  Bottom 0.254: v132.72,4.76 132.08,4.13 120.33,4.13 118.11,1.91 73.66,1.91 71.12,4.45 v70.48,4.45 | 68.58,6.35 v69.53,5.4 | 68.58,6.35 50.8,6.35 U$1.37 | v56.52,18.1 58.74,15.88 69.85,15.88 70.48,15.24 70.48,6.35 68.58,6.35
L11  (via drill 0.38)
  Top 0.254: U$1.38 49.53,7.62 U$1.50 50.8,11.43 v50.8,16.19
  Bottom 0.254: IC2.3 132.72,14.61 116.2,14.61 115.89,14.92 89.85,14.92 88.27,16.51 60.01,16.51 57.47,19.05 | 57.47,19.05 57.15,19.37 U$1.31 | v50.8,16.19 53.66,19.05 57.47,19.05
L12  (via drill 0.38)
  Top 0.254: IC2.4 132.72,12.06 v132.72,15.56 | U$1.49 53.34,11.43 53.34,13.97 U$1.32
  Bottom 0.254: v132.72,15.56 131.76,16.51 99.69,16.51 99.38,16.19 97.47,18.1 97.47,20.95 90.49,20.95 89.85,20.32 U$1.32
LED1  (via drill 0.38)
  Top 0.254: IC1.18 114.94,18.41 114.94,13.02 115.57,12.38 v115.57,10.48 | R1.P$2 v71.44,12.38
  Bottom 0.254: v115.57,10.48 114.62,9.53 106.36,9.53 105.73,8.89 77.79,8.89 76.2,10.48 76.2,12.38 v71.44,12.38
LED2  (via drill 0.38)
  Top 0.254: v78.74,26.04 75.56,22.86 75.56,18.41 R2.P$2
  Bottom 0.254: IC1.17 111.76,25.4 79.38,25.4 v78.74,26.04
LED3
  Top 0.254: IC1.16 108.27,18.1 108.27,11.11 107.63,10.48 107.63,10.16 99.38,1.91 73.66,1.91 73.66,13.97 R3.P$2
LED4  (via drill 0.38)
  Top 0.254: v78.74,25.08 77.79,24.13 77.79,23.18 78.11,22.86 78.11,15.88 R4.P$2
  Bottom 0.254: IC1.15 106.68,24.77 79.06,24.77 v78.74,25.08
LED5  (via drill 0.38)
  Top 0.254: v78.74,24.13 79.38,23.5 79.38,15.88 R17.P$2
  Bottom 0.254: IC1.14 104.14,24.13 v78.74,24.13
LED6  (via drill 0.38)
  Top 0.254: v90.17,22.23 87,19.05 87,13.97 86.36,13.34 83.19,13.34 R18.P$2
  Bottom 0.254: IC1.13 101.6,22.23 v90.17,22.23
LED7  (via drill 0.38)
  Top 0.254: v87,21.27 85.72,20 R19.P$2
  Bottom 0.254: IC1.12 99.06,21.59 90.49,21.59 89.85,20.95 87.31,20.95 v87,21.27
LED8  (via drill 0.38)
  Top 0.254: v89.85,18.1 88.27,16.51 R20.P$2
  Bottom 0.254: IC1.11 94.61,17.14 93.34,17.14 92.39,18.1 v89.85,18.1
LED9  (via drill 0.38)
  Top 0.254: v99.38,17.14 100.01,16.51 100.01,8.26 96.52,4.76 74.93,4.76 R9.P$2
  Bottom 0.254: IC2.18 139.06,17.14 v99.38,17.14
LED10
  Bottom 0.254: IC2.17 140.34,20.95 141.29,20.95 141.92,20.32 141.92,9.21 119.7,9.21 114.62,4.13 84.45,4.13 83.19,5.4 79.38,5.4 77.47,3.49 R10.P$2
LED11  (via drill 0.38)
  Top 0.254: v119.7,20.95 117.47,18.73 v117.47,6.03
  Bottom 0.254: IC2.16 133.99,20.95 v119.7,20.95 | v117.47,6.03 114.62,3.17 84.77,3.17 83.19,4.76 81.28,4.76 80.01,3.49 R11.P$2
LED12  (via drill 0.38)
  Top 0.254: IC2.15 131.76,17.46 131.76,3.49 130.81,2.54 130.81,1.59 130.49,1.27 128.27,1.27 128.27,4.13 122.24,10.16 122.24,13.97 119.7,16.51 118.75,16.51 v118.75,3.49
  Bottom 0.254: v118.75,3.49 117.79,2.54 83.19,2.54 82.55,3.17 R12.P$2
M_AIN  (via drill 0.38)
  Top 0.254: U1.3 128.59,34.61 128.91,34.92 v128.91,35.56 128.91,60.96 v124.14,65.72 | U$1.40 39.69,13.02 v39.69,18.41 | v44.45,18.73 45.72,20 45.72,25.72 46.67,26.67 46.67,33.97 46.35,34.29 46.35,34.92 58.1,46.67 61.91,46.67 61.91,53.34 60.33,54.93 60.33,56.52 v69.85,66.04
  Bottom 0.254: U$7.AIN1 v128.91,35.56 | v39.69,18.41 40.01,18.73 v44.45,18.73 | v69.85,66.04 70.17,65.72 v124.14,65.72
M_BIN
  Top 0.254: U$7.BIN2 135.89,29.21 135.89,34.29 130.49,34.29 U1.1 130.49,34.61 130.49,78.74 55.24,78.74 50.8,74.3 50.8,51.75 44.13,45.09 44.13,36.83 41.59,34.29 41.59,26.67 40.64,25.72 40.64,20 41.59,19.05 41.59,13.02 U$1.41
M_JOYB
  Top 0.254: U$1.0 5.4,21.91 5.4,74.3 7.62,76.52 17.14,76.52 U2.B1A
M_JOYH
  Top 0.381: U$1.18 20.32,6.35 20.32,20.95 19.68,21.59 19.68,48.9 U2.H2
M_JOYV  (via drill 0.38)
  Top 0.381: U$1.17 25.4,6.35 v25.4,19.37 | v8.89,26.04 8.57,26.35 8.57,58.1 U2.V2
  Bottom 0.381: v25.4,19.37 25.4,21.91 21.59,21.91 17.46,26.04 v8.89,26.04
M_PWMA  (via drill 0.38)
  Top 0.254: U$1.21 12.7,3.81 5.08,3.81 5.08,20.95 6.03,21.91 6.03,61.91 13.02,68.9 29.53,68.9 v29.53,65.09 | v131.44,66.99 131.76,66.67 131.76,43.5 U$7.PWMA
  Bottom 0.254: v29.53,65.09 31.43,66.99 v131.44,66.99
M_PWMB  (via drill 0.38)
  Top 0.254: U$1.22 10.16,6.35 10.16,15.56 8.89,16.83 8.89,18.73 7.62,20 v7.62,42.23 | v77.79,61.59 82.55,56.83 82.55,45.4 89.53,38.42 91.12,38.42 91.12,35.24 96.2,30.16 v96.2,27.94
  Bottom 0.254: v7.62,42.23 24.13,58.74 64.45,58.74 67.31,61.59 v77.79,61.59 | v96.2,27.94 116.2,27.94 118.75,25.4 U$7.PWMB
N$1  (via drill 0.38)
  Top 0.254: v39.05,30.16 39.05,33.66 42.55,37.15 S1.A
  Bottom 0.254: v39.05,30.16 39.05,24.45 60.64,24.45 61.59,25.4 69.53,25.4 70.48,24.45 70.48,22.23 R1.P$1
N$2
  Top 0.254: LED13.A 11.43,36.51 10.48,35.56 10.48,33.02 11.75,31.75 R13.P$1
N$3
  Top 0.254: LED14.A 16.83,36.51 17.78,35.56 17.78,32.7 16.83,31.75 R14.P$1
N$4
  Top 0.254: LED15.A 21.91,36.51 22.86,35.56 22.86,32.7 21.91,31.75 R15.P$1
N$5  (via drill 0.38)
  Top 0.254: v131.44,30.48 130.49,31.43 U1.6
  Bottom 0.254: U$7.BIN1 v131.44,30.48
N$6  (via drill 0.38)
  Top 0.254: v127.95,36.2 127.95,32.38 128.59,31.75 U1.4
  Bottom 0.254: v127.95,36.2 129.86,38.1 U$7.AIN2
N$7
  Top 0.254: LED16.A 26.99,36.51 27.94,35.56 27.94,32.7 26.99,31.75 R16.P$1
N$8  (via drill 0.38)
  Top 0.254: S2.A 61.91,33.34 v61.91,31.43 | v70.48,30.48 70.8,30.16 70.8,23.18 R2.P$1
  Bottom 0.254: v61.91,31.43 62.87,30.48 v70.48,30.48
N$9
  Bottom 0.254: S3.A 44.77,25.08 60.64,25.08 61.59,26.04 70.48,26.04 R3.P$1
N$10  (via drill 0.38)
  Top 0.254: S4.A 60.01,25.08 v60.01,22.86
  Bottom 0.254: v60.01,22.86 61.91,20.95 75.56,20.95 R4.P$1
N$15  (via drill 0.38)
  Top 0.254: v102.87,7.94 105.09,10.16 105.09,35.56 106.36,36.83 S9.A
  Bottom 0.254: v102.87,7.94 102.55,8.26 77.47,8.26 74.93,10.79 R9.P$1
N$16  (via drill 0.38)
  Top 0.254: v82.23,29.84 81.92,29.53 81.92,13.97 80.33,12.38 77.47,12.38 R10.P$1
  Bottom 0.254: v82.23,29.84 82.55,29.53 120.33,29.53 120.33,32.38 121.28,33.34 121.28,36.83 S10.A
N$17  (via drill 0.38)
  Top 0.254: v105.73,9.84 105.73,26.04 106.36,26.67 S11.A
  Bottom 0.254: v105.73,9.84 105.41,9.53 81.28,9.53 80.01,10.79 R11.P$1
N$18  (via drill 0.38)
  Top 0.254: S12.A 115.89,21.27 v115.89,13.97
  Bottom 0.254: v115.89,13.97 89.53,13.97 86.68,11.11 82.55,11.11 R12.P$1
N$19
  Top 0.254: S5.A 75.88,38.42 75.88,42.55 76.83,43.5 80.64,43.5 R17.P$1
N$20
  Top 0.254: S6.A 83.19,30.48 R18.P$1
N$21
  Bottom 0.254: R19.P$1 84.45,23.5 80.01,23.5 79.69,23.18 78.11,23.18 74.61,26.67 S7.A
N$22
  Top 0.254: S8.A 88.27,25.4 R20.P$1
N$45
  Bottom 0.381: MOTORS1.P$1 U$7.BO1
N$46
  Bottom 0.381: MOTORS1.P$2 U$7.BO2
N$52
  Bottom 0.381: MOTORS1.P$3 U$7.AO2
N$54
  Bottom 0.381: MOTORS1.P$4 U$7.AO1
S1
  Top 0.254: U$1.9 25.4,21.59 25.4,46.99 30.48,52.07 30.48,70.48 39.37,79.38 162.24,79.38 162.24,57.15 J1.3
S2  (via drill 0.38)
  Top 0.254: U$1.10 29.84,20.95 v29.84,45.09 | v71.12,50.48 v66.67,46.04
  Bottom 0.254: v29.84,45.09 30.16,45.4 66.04,45.4 v66.67,46.04 | v71.12,50.48 140.02,50.48 140.65,51.12 159.38,51.12 162.24,48.26 J2.3
S_JOYB
  Bottom 0.254: U$1.1 6.35,41.27 3.49,44.13 3.49,79.38 133.03,79.38 140.34,72.07 U3.B1A
S_JOYH  (via drill 0.38)
  Top 0.381: v71.75,1.59 v68.58,4.76 | v132.08,2.54 139.7,10.16 139.7,45.72 U3.H2
  Bottom 0.381: U$1.20 19.68,1.91 66.04,1.91 68.58,4.45 v68.58,4.76 | v71.75,1.59 72.71,0.64 130.18,0.64 v132.08,2.54
S_JOYV  (via drill 0.38)
  Top 0.381: U$1.19 17.78,6.35 17.78,15.24 19.05,16.51 19.05,18.41 17.78,19.68 17.78,22.86 18.41,23.5 18.41,36.2 v18.1,36.51 | v99.69,51.44 v99.69,42.86
  Bottom 0.381: v18.1,36.51 20.95,39.37 96.2,39.37 v99.69,42.86 | v99.69,51.44 100.65,52.39 119.38,52.39 126.68,59.69 U3.V2
U1  (via drill 0.38)
  Top 0.254: U$1.51 43.18,11.43 v43.18,15.88
  Bottom 0.254: v43.18,15.88 21.91,15.88 17.78,20 17.78,22.54 13.34,22.54 12.06,23.81 R13.P$2
U2  (via drill 0.38)
  Top 0.254: U$1.52 40.64,11.43 v40.64,16.83
  Bottom 0.254: v40.64,16.83 23.5,16.83 20.32,20 20.32,22.23 18.73,22.23 17.14,23.81 16.83,23.81 R14.P$2
U3  (via drill 0.38)
  Top 0.254: U$1.53 36.51,13.02 v36.51,17.78
  Bottom 0.254: v36.51,17.78 35.24,19.05 28.89,19.05 27.94,20 27.94,22.54 23.18,22.54 R15.P$2
U4  (via drill 0.38)
  Top 0.254: U$1.54 22.86,11.43 22.86,22.54 v23.81,23.5
  Bottom 0.254: v23.81,23.5 24.13,23.81 26.67,23.81 R16.P$2
VMOT
  Top 0.381: U$7.VMOT 142.56,18.1 142.56,4.13 140.97,2.54 VOUT.2